# EAGLE board thermalsTurnedONTest (EAGLE 7.2.0)
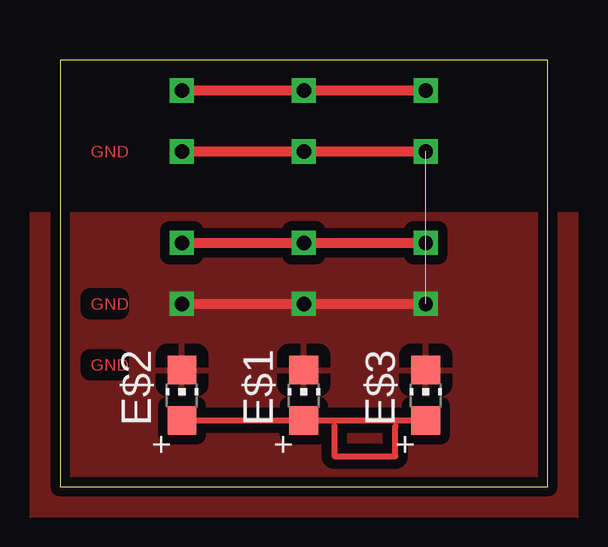
[diagram p0: board, top side]

Size 20.32 x 17.78 mm. Coordinates in mm from the lower left corner, seen from the top.
Outline: 0,0 20.32,0 20.32,17.78 0,17.78 0,0
Copper layers (1*16): Top 0.035mm / dielectric 1.5mm / Bottom 0.035mm
Design rules "default *": minimum track width 10mil, minimum drill 24mil, track to track 8mil, track to pad 8mil, pad to pad 8mil, via to via 8mil, smd to smd 8mil, copper to edge 8mil, drill to drill 8mil, minimum pad ring 10mil, minimum via ring 8mil, stop-mask expansion 4mil, vias tented up to drill 0mil, thermal gap 20mil

## Footprints (pad centres in the part's own frame; a part is rotated, then mirrored left to right if it is on the bottom)
CHIP-LED0805 = smd 1.2 x 1.2: A 0,-1.05; C 0,1.05

## Placement (x,y rotation side)
E$1  [CHIP-LED0805]  10.16,3.81 0 top
E$2  [CHIP-LED0805]  5.08,3.81 0 top
E$3  [CHIP-LED0805]  15.24,3.81 0 top

## Library data of the parts
E$1-E$3 = adafruit

## Nets
GND: E$1.C E$2.C E$3.C
S$3: E$1.A E$2.A E$3.A

## Tracks (layer width: path | path; a pad name or v marks a point on that pad's centre or on a via)
GND  (via drill 0.6)  (1 unrouted)
  Top 0.406: v5.08,7.62 v10.16,7.62 v15.24,7.62 | v5.08,13.97 v10.16,13.97 v15.24,13.97
  pour Top (isolate 0.406): -1.27,11.43 21.59,11.43 21.59,-1.27 -1.27,-1.27
S$1  (via drill 0.6)
  Top 0.406: v5.08,10.16 v10.16,10.16 v15.24,10.16
S$2  (via drill 0.6)
  Top 0.406: v5.08,16.51 v10.16,16.51 v15.24,16.51
S$3
  Top 0.254: E$2.A E$1.A E$3.A
S$4
  Top 0.254: 11.43,2.54 11.43,1.27 13.97,1.27 13.97,2.54

## Text on the board
Top: GND | GND | GND